# Altium PCB PCB_V1.PcbDoc
Units mm, origin at the board's own origin, x right, y up, seen from the top; angles counter-clockwise.
Board outline 39.75 x 33.15 mm, 2 copper layers (Top Layer, Bottom Layer); 7 components, 18 nets, 53 pads, 5 vias.
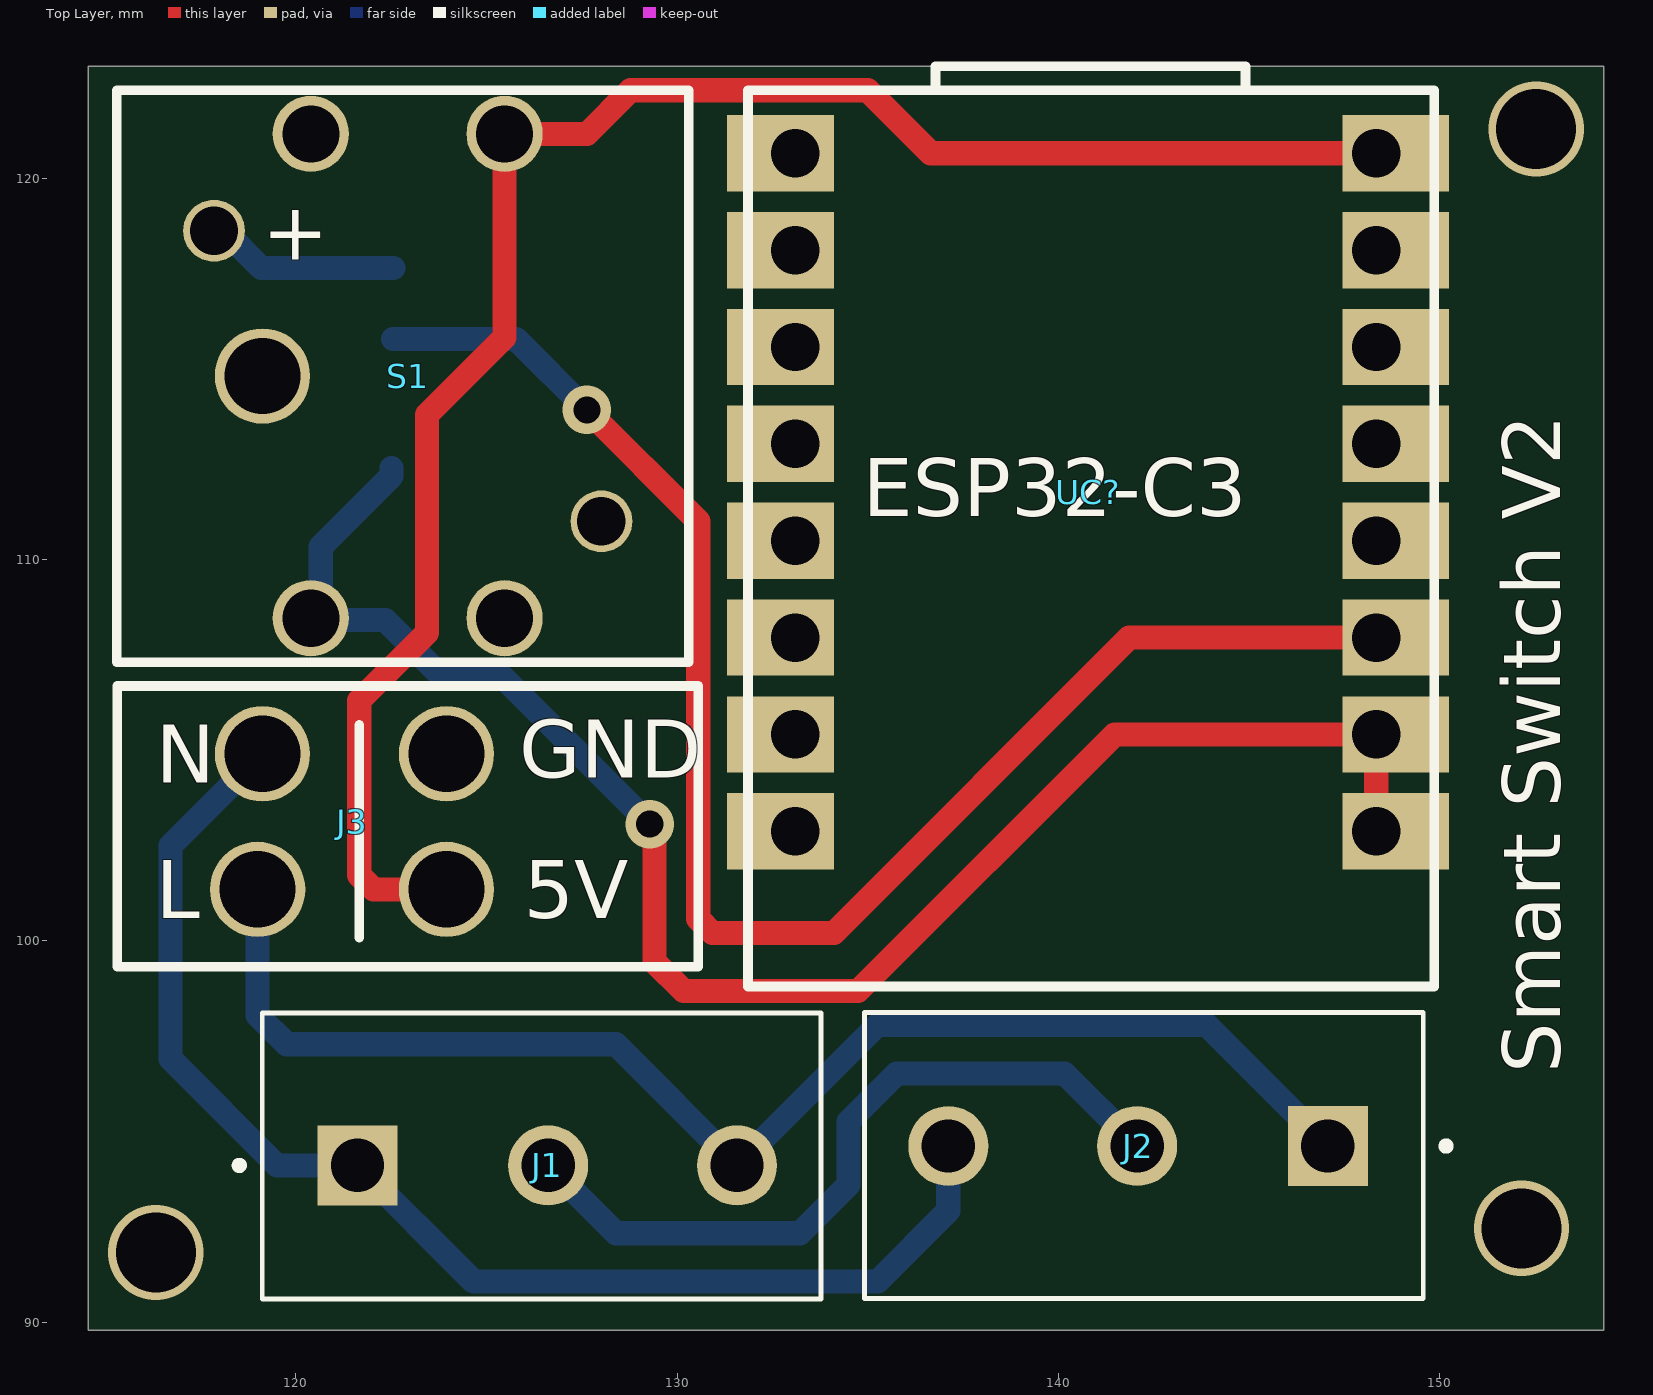
[diagram p0: Top Layer view]
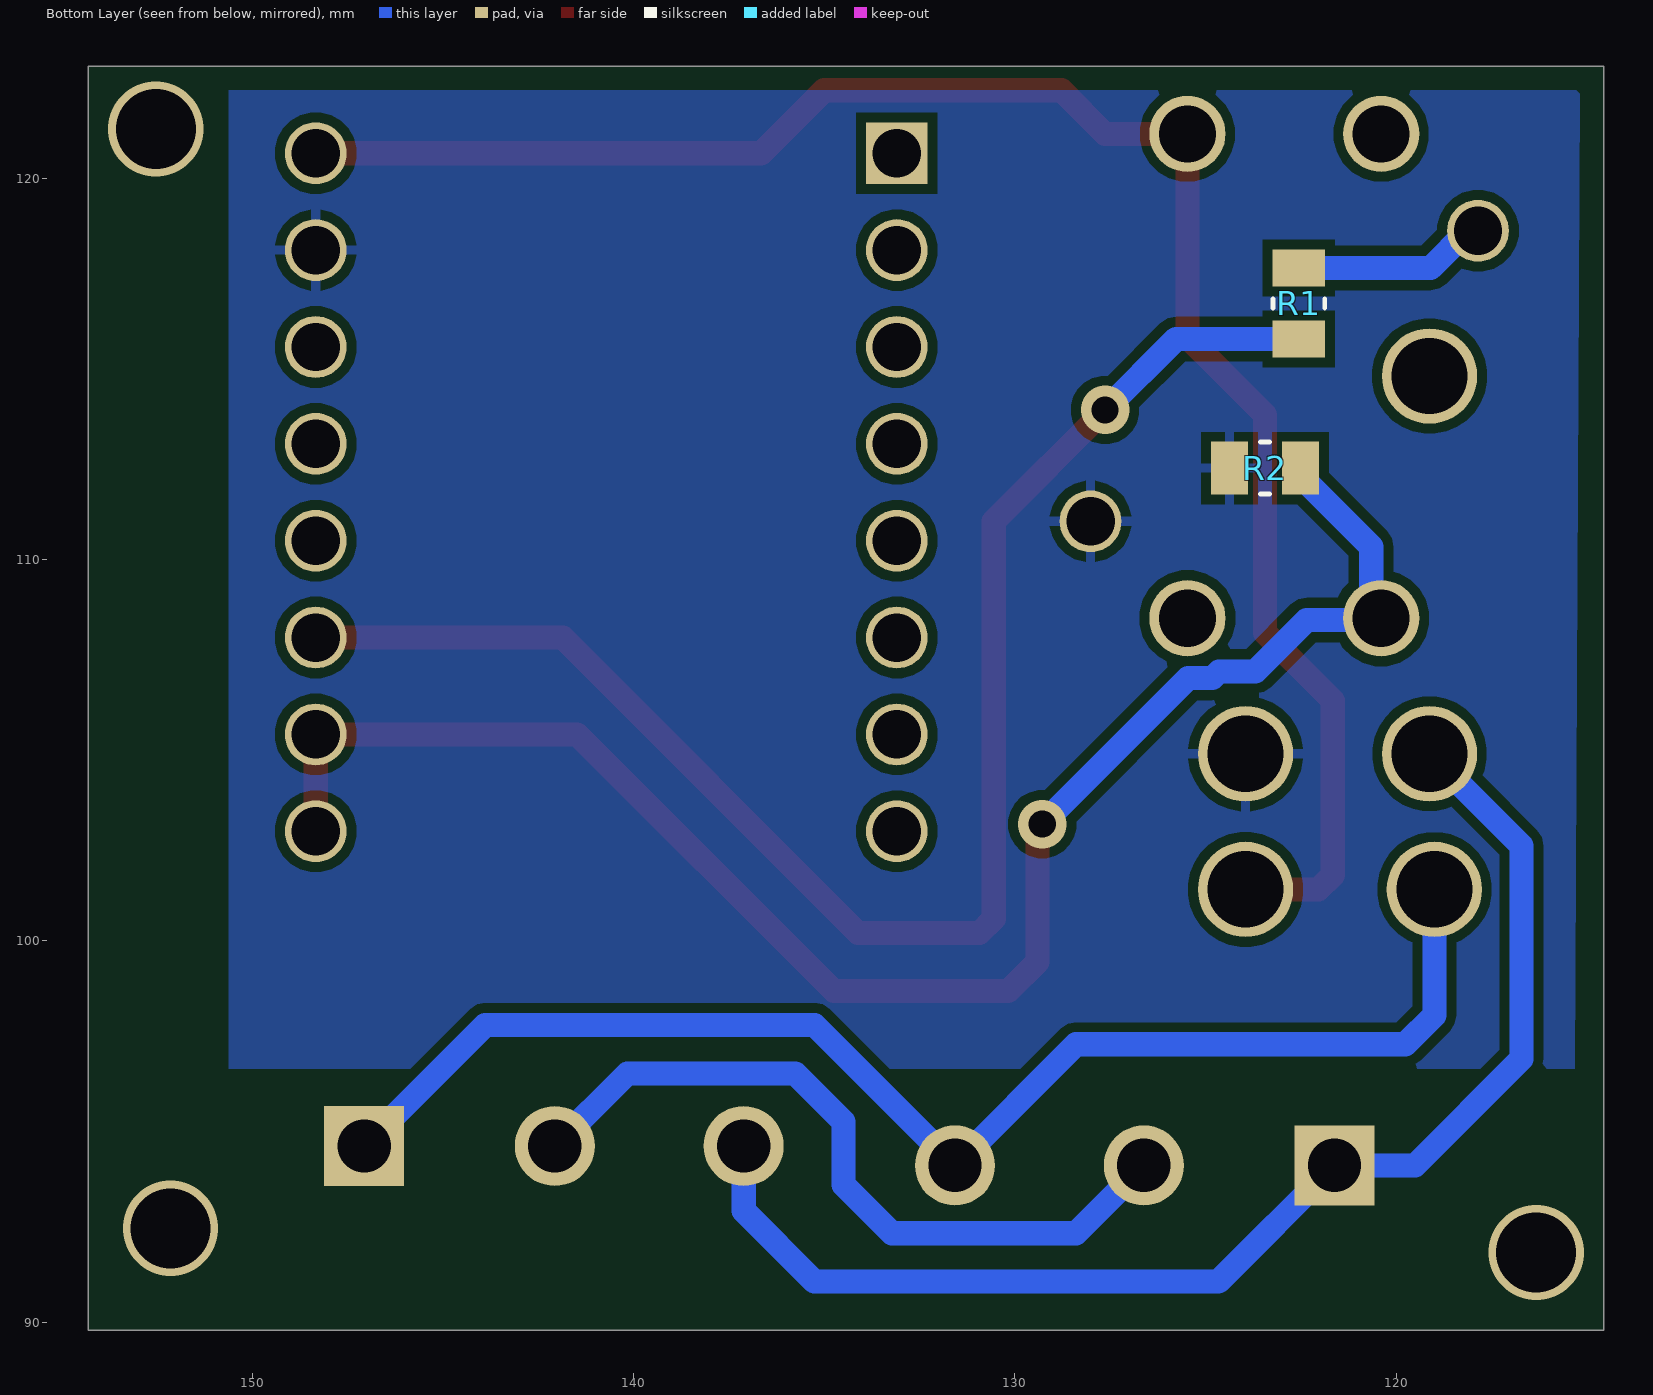
[diagram p1: Bottom Layer view, seen from below]

## Layer stack, top to bottom
Top Solder: solder mask 0.0102, Solder Resist, Dk 3.5
Top Layer: signal copper 0.0356
Dielectric 1: dielectric 0.32, FR-4, Dk 4.8
Bottom Layer: signal copper 0.0356
Bottom Solder: solder mask 0.0102, Solder Resist, Dk 3.5

## Board outline
114.554,89.789 114.554,122.936 154.305,122.936 154.305,89.789

## Design rules (kind name [scope] priority, off if disabled: settings)
Clearance Clearance_1 [OnMid vs OnMid] p1: gap=0.254 ignorepadtopadclearanceinfootprint=FALSE sourcerule=37 cellrowname=All cellrowtype=0 cellcolname=All cellcoltype=0 innerlayers=TRUE
Clearance Clearance_2 [(ExistsOnLayer('Top Layer') Or ExistsOnLayer('Bottom Layer')) vs (ExistsOnLayer('Top Layer') Or ExistsOnLayer('Bottom Layer'))] p2: gap=0.254 ignorepadtopadclearanceinfootprint=FALSE sourcerule=37 cellrowname=All cellrowtype=0 cellcolname=All cellcoltype=0 outerlayers=TRUE
Clearance [All] p3: gap=0.254 ignorepadtopadclearanceinfootprint=FALSE ismatrix=TRUE
PolygonConnect [All] p1: connectstyle=Relief reliefconductorwidth=0.254 reliefentries=4 polygonreliefangle="90 Angle" airgapwidth=0.254
RoutingVias [All] p1: holewidth=0.711 width=1.27 viastyle="Through Hole" minholewidth=0.711 minwidth=1.27 maxholewidth=0.711 maxwidth=1.27
SolderMaskExpansion [All] p1: expansion=0.102 istentingtop=FALSE
Width MaxMinWidth_1 [All] p1: maxlimit=1.27 minlimit=0.254 preferedwidth=0.254 minimp=50.000000 maximp=50.000000 favimp=50.000000
Width [All] p2: maxlimit=0.254 minlimit=0.254 preferedwidth=0.254
30 further rules are at their usual default settings.

## Classes and differential pairs
component class U_Switch: R1 R2 S1
component class Top: J1 J2 J3

## Components (designator, comment, footprint, x,y, rotation, side; value= is the part's Value field where it differs from the comment)
J1 "Off Board Connector 3Pin" "OFF BORAD CONNECTOR 3PIN" 126.659,94.107 r0 top
J2 "Off Board Connector 3Pin" "OFF BORAD CONNECTOR 3PIN" 142.026,94.615 r180 top
J3 "5VPowerBlock" 5VPowerBlock 120.396,102.743 r0 top
R1 "SMD Resistor" "SMD Resistor" 122.555,116.713 r90 bottom
R2 "SMD Resistor" "SMD Resistor" 123.444,112.395 r0 bottom
S1 "Honyone TS Series" "Honyone TS Series" 122.936,113.538 r0 top
UC? "ESP32_C3_Super_Mini" ESP32_C3_Super_Mini 140.716,110.49 r0 top

## Footprints (in the part's own frame and the unit in brackets; to place one, negate y for a bottom-side part, rotate by r counter-clockwise, add the part's x,y. Pads: shape width x height; smd on the part's side, far side on the other; paste and mask are expansions set on the pad)
5VPowerBlock [mm]
  round 2.5 hole 2: 1(-1.27,2.159) 2(-1.397,-1.397) 3(3.556,-1.397) 4(3.556,2.159)
  silkscreen extent -5.08,-3.43 10.16,3.94
ESP32_C3_Super_Mini [mm]
  round 1.62 hole 1.27: 1(7.62,10.16) 2(7.62,7.62) 3(7.62,5.08) 4(7.62,-7.62) 5(7.62,-5.08) 6(7.62,-2.54) 7(7.62,0) 8(7.62,2.54) 10(-7.62,7.62) 11(-7.62,5.08) 12(-7.62,2.54) 13(-7.62,0) 14(-7.62,-2.54) 15(-7.62,-5.08) 16(-7.62,-7.62)
  rect 2.8x2 smd: 1(8.128,10.16) 2(8.128,7.62) 3(8.128,5.08) 4(8.128,-7.62) 5(8.128,-5.08) 6(8.128,-2.54) 7(8.128,0) 8(8.128,2.54) 9(-8.001,10.16) 10(-8.001,7.62) 11(-8.001,5.08) 12(-8.001,2.54) 13(-8.001,0) 14(-8.001,-2.54) 15(-8.001,-5.08) 16(-8.001,-7.62)
  rect 1.62x1.62 hole 1.27: 9(-7.62,10.16)
  silkscreen extent -8.86,-11.69 9.14,12.45
"Honyone TS Series" [mm]
  round 2 hole 1.5: 1(-2.54,7.62) 2(2.54,7.62) 3(-2.54,-5.08) 4(2.54,-5.08)
  round 1.62 hole 1.27: A(-5.08,5.08) K(5.08,-2.54)
  round 2.5 hole 2: NC(-3.81,1.27)
  silkscreen extent -7.63,-6.24 7.37,8.76
"OFF BORAD CONNECTOR 3PIN" [mm]
  rect 2.1x2.1 hole 1.4: 1(-5.04,0)
  round 2.1 hole 1.4: 2(-0.04,0) 3(4.913,0)
  silkscreen extent -8.24,-3.5 7.11,4
"SMD Resistor" [mm]
  rect 0.97x1.38 smd: 1(-0.93,0) 2(0.93,0)
  silkscreen extent -0.12,-0.68 0.12,0.68, body extent -0.98,-0.63 1.02,0.63, height 0.6

## Part data
J1 J2: library part CMP-007-000001-1, "Screw Connector", Design Item ID="Off Board Connector 3Pin", Source=Basic.SchLib
J3: library part CMP-012-000011-1, Design Item ID=5VPowerBlock, Source=Basic.SchLib
R1 R2: library part CMP-009-000002-1, Design Item ID="SMD Resistor", Source=Basic.SchLib
S1: library part CMP-012-000009-1, Design Item ID="Honyone TS Series", Source=Basic.SchLib
UC?: library part CMP-003-000012-2, Design Item ID=ESP32_C3_Super_Mini, Source=Components.SchLib

## Via types
v1: diameter 2.5, hole 2.1, Top Layer to Bottom Layer, 3 vias
v2: diameter 1.27, hole 0.711, Top Layer to Bottom Layer, 2 vias

## Nets (pads, with @x,y where several pads share a name; then routed paths per layer and width w, separated by ;. In a path a pad name is that pad's centre, name@x,y a point inside that pad or via, vN(x,y) a via of type N, cw(c..) or ccw(c..) an arc to the next point about the centre after c; other vN are vias at no path point)
+5: J3.3 S1.2 UC?.1 | length 47.5
  Top Layer w0.635: J3.3 122.038,101.346 121.666,101.718 121.666,106.299 123.444,108.077 123.444,113.792 125.476,115.824 S1.2 127.635,121.158 128.778,122.301 135.001,122.301 136.652,120.65 UC?.1@148.336,120.65
GND: J3.4 R2.2 S1.K UC?.2
NetJ1_1: J1.1 J2.3 J3.1 | length 34.3
  Bottom Layer w0.635: J3.1 116.713,102.489 116.713,96.901 119.507,94.107 J1.1 124.667,91.059 135.255,91.059 137.113,92.917 J2.3
NetJ1_2: J1.2 J2.2 | length 19.7
  Bottom Layer w0.635: J1.2 128.397,92.329 133.223,92.329 134.493,93.599 134.493,95.25 135.763,96.52 140.161,96.52 J2.2
NetJ1_3: J1.3 J2.1 J3.2 | length 35.8
  Bottom Layer w0.635: J3.2 118.999,98.044 119.761,97.282 128.397,97.282 J1.3 135.255,97.79 143.891,97.79 J2.1
NetR1_1: R1.1 UC?.6 | length 41.5
  Top Layer w0.635: v2(127.635,113.919) 130.556,110.998 130.556,100.575 130.928,100.203 134.112,100.203 141.859,107.95 UC?.6@148.336,107.95
  Bottom Layer w0.635: R1.1 125.771,115.783 v2(127.635,113.919)
NetR1_2: R1.2 S1.A | length 5.1
  Bottom Layer w0.635: S1.A 118.123,118.618 119.098,117.643 R1.2
NetR2_1: R2.1 S1.3 UC?.4 UC?.5 | length 44.2
  Top Layer w0.635: v2(129.283,103.058) 129.404,102.936 129.404,99.45 130.175,98.679 134.747,98.679 141.478,105.41 148.336,105.41 UC?.4@148.336,102.87
  Bottom Layer w0.635: R2.1 122.514,112.19 120.657,110.333 120.657,108.719 S1.3 120.444,108.41 122.349,108.41 123.698,107.061 124.651,107.061 124.825,106.886 125.454,106.886 v2(129.283,103.058)
NetUC?_7: UC?.7
NetUC?_8: UC?.8
NetUC?_9: UC?.9
NetUC?_10: UC?.10
NetUC?_11: UC?.11
NetUC?_12: UC?.12
NetUC?_13: UC?.13
NetUC?_14: UC?.14
NetUC?_15: UC?.15
NetUC?_16: UC?.16
pads on no net: S1.1 S1.4 S1.NC UC?.3
copper on no net:
  other v1: 116.332,91.821 152.146,92.456 152.527,121.285

## Polygon pours and split planes (outlines as drawn)
GND on Bottom Layer "GND_L02_P000" (solid, remove dead copper, pour order 0): 115.189,122.301 150.622,122.301 150.622,96.647 115.316,96.647

## Silkscreen, mask and mechanical layers (free items; w line width, h text height)
Top Overlay:
  text "Smart Switch V2" at 153.162,96.52 h1.52 r90

## Text inside footprints (layer, text, board x,y; h text height)
J3: Top Overlay "L" at 116.332,100.584 h1.52; Top Overlay "N" at 116.332,104.14 h1.52; Top Overlay "5V" at 125.984,100.584 h1.52; Top Overlay "GND" at 125.857,104.267 h1.52
S1: Top Overlay "+" at 119.126,117.856 h1.52
UC?: Top Overlay "ESP32-C3" at 134.874,111.125 h1.52